# Altium PCB Motherboard_Rev1_A.PcbDoc
Units mil, origin at the board's own origin, x right, y up, seen from the top; angles counter-clockwise.
Board outline 3937 x 3937 mil, 4 copper layers (POWER, GND, HIGH-SPEED, LOW-SPEED), stack 66.024 mil thick; 25 components, 2 nets, 102 pads, 244 vias.
Unrouted connection lines stored in the file: 15.
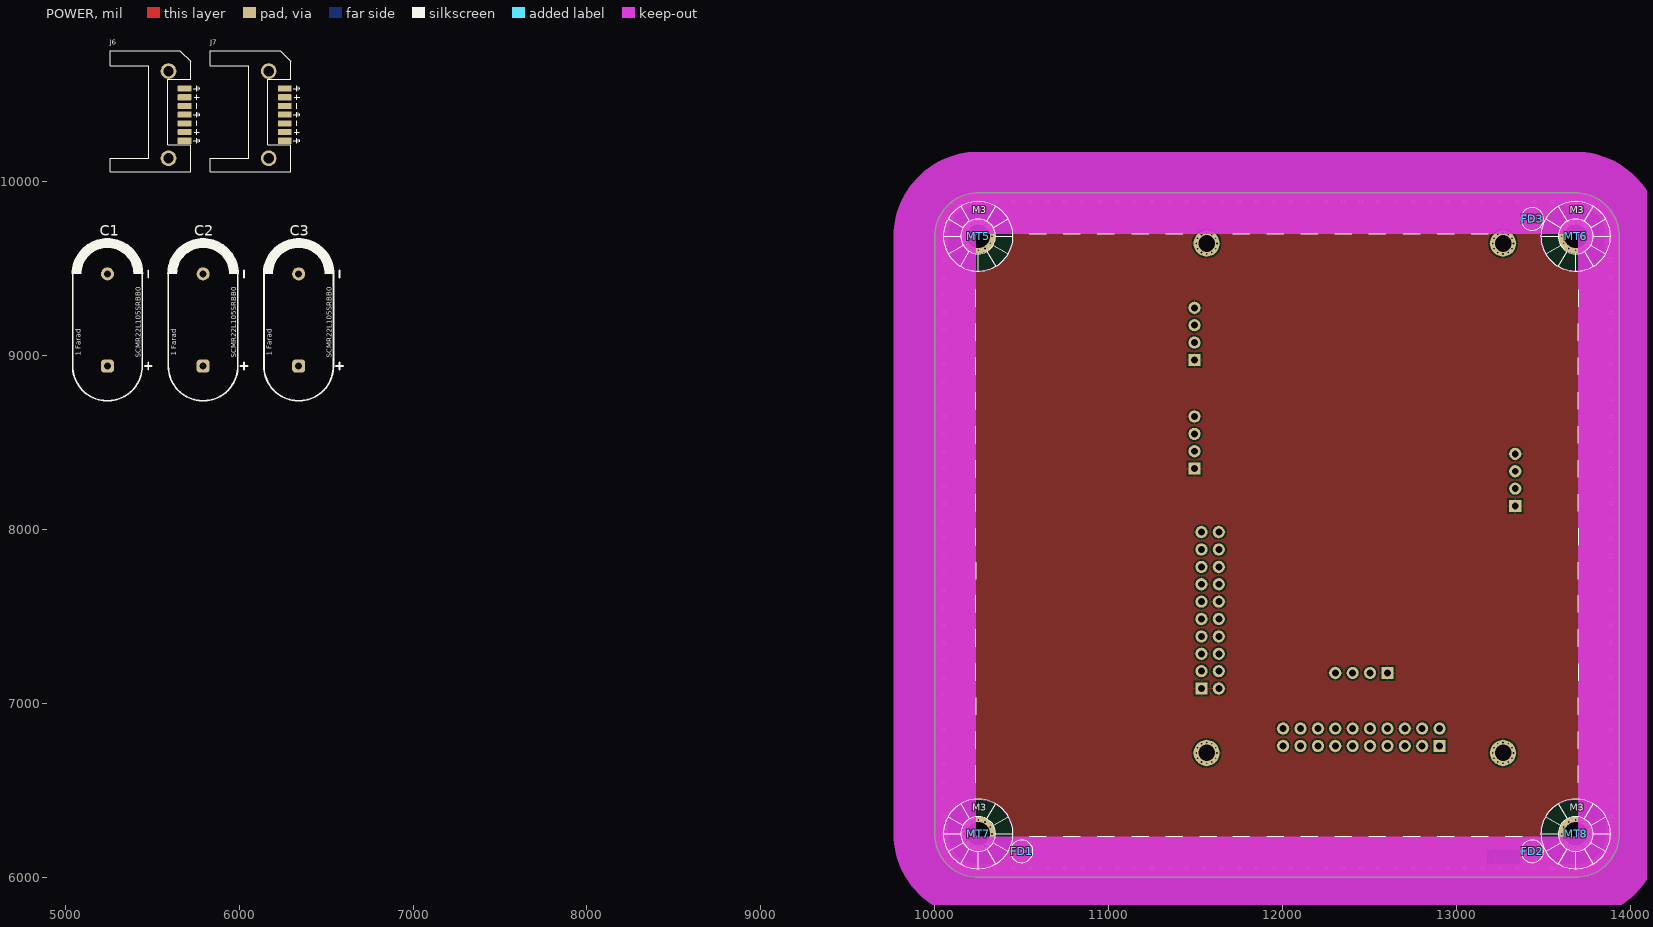
[diagram p0: POWER view]
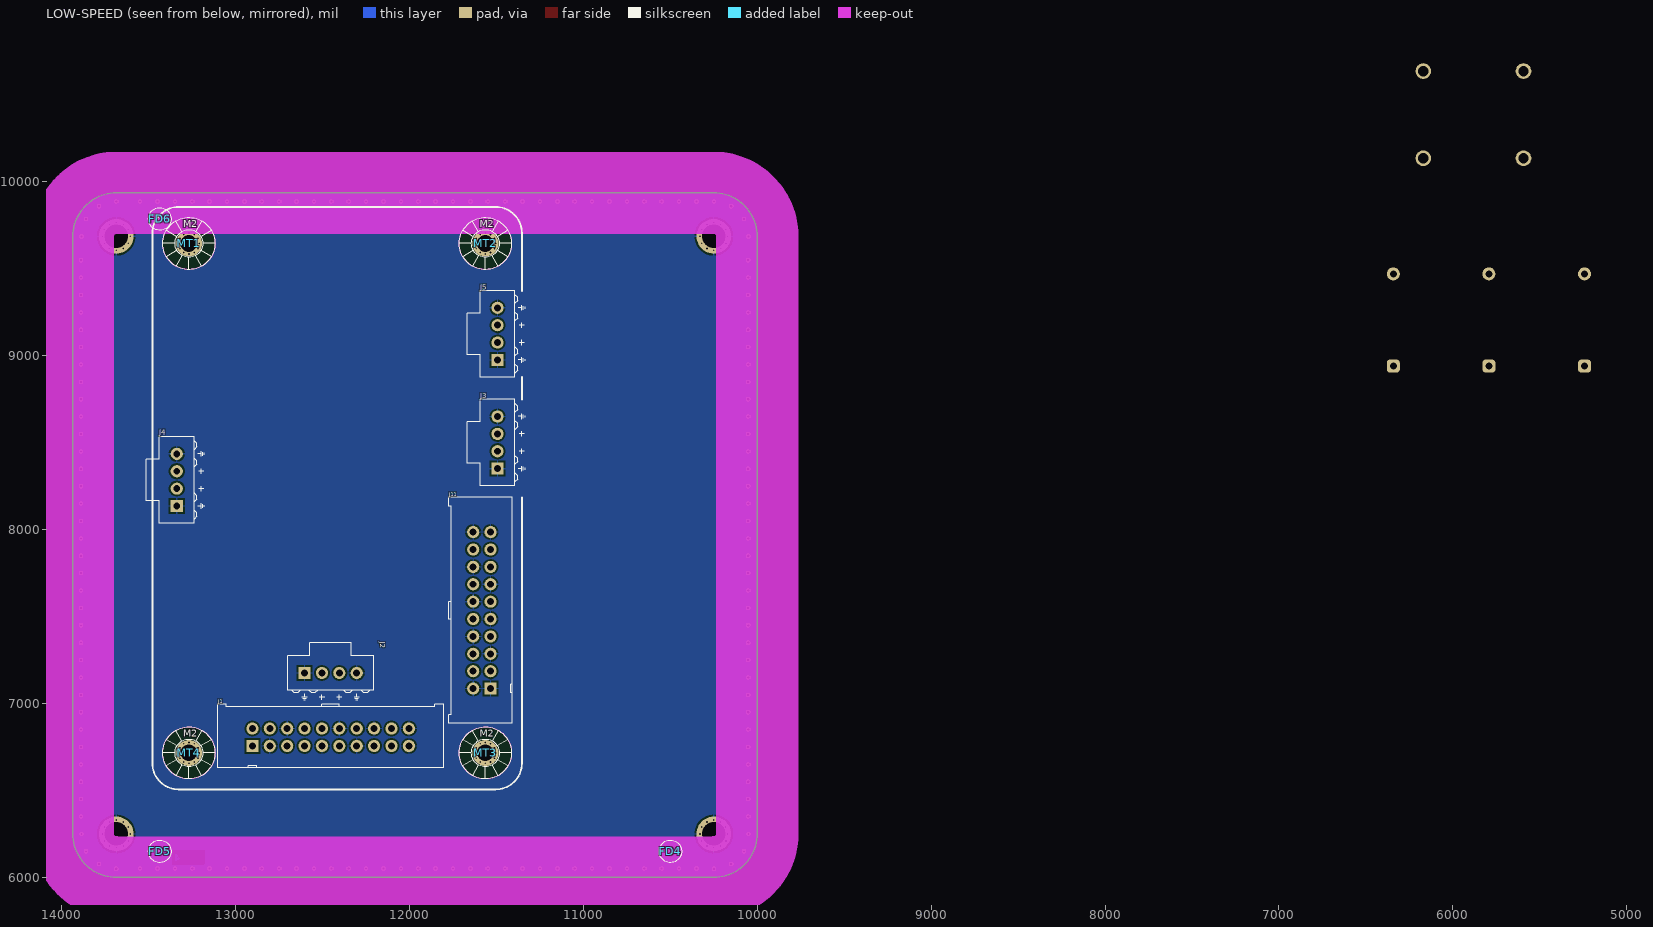
[diagram p1: LOW-SPEED view, seen from below]
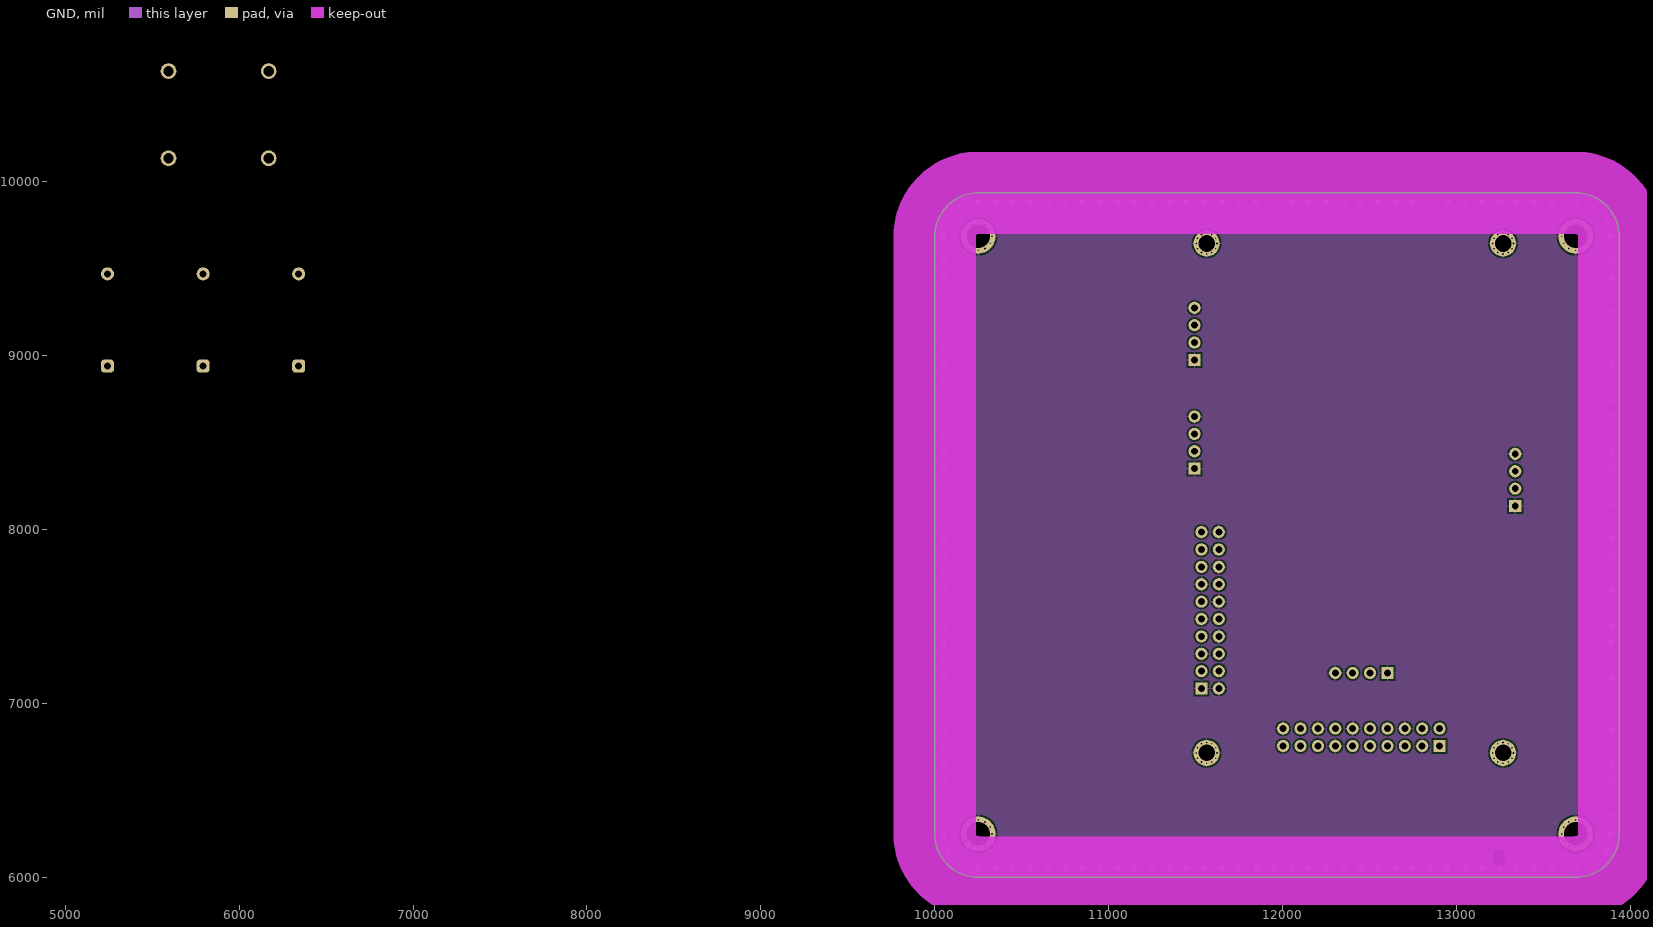
[diagram p2: GND]
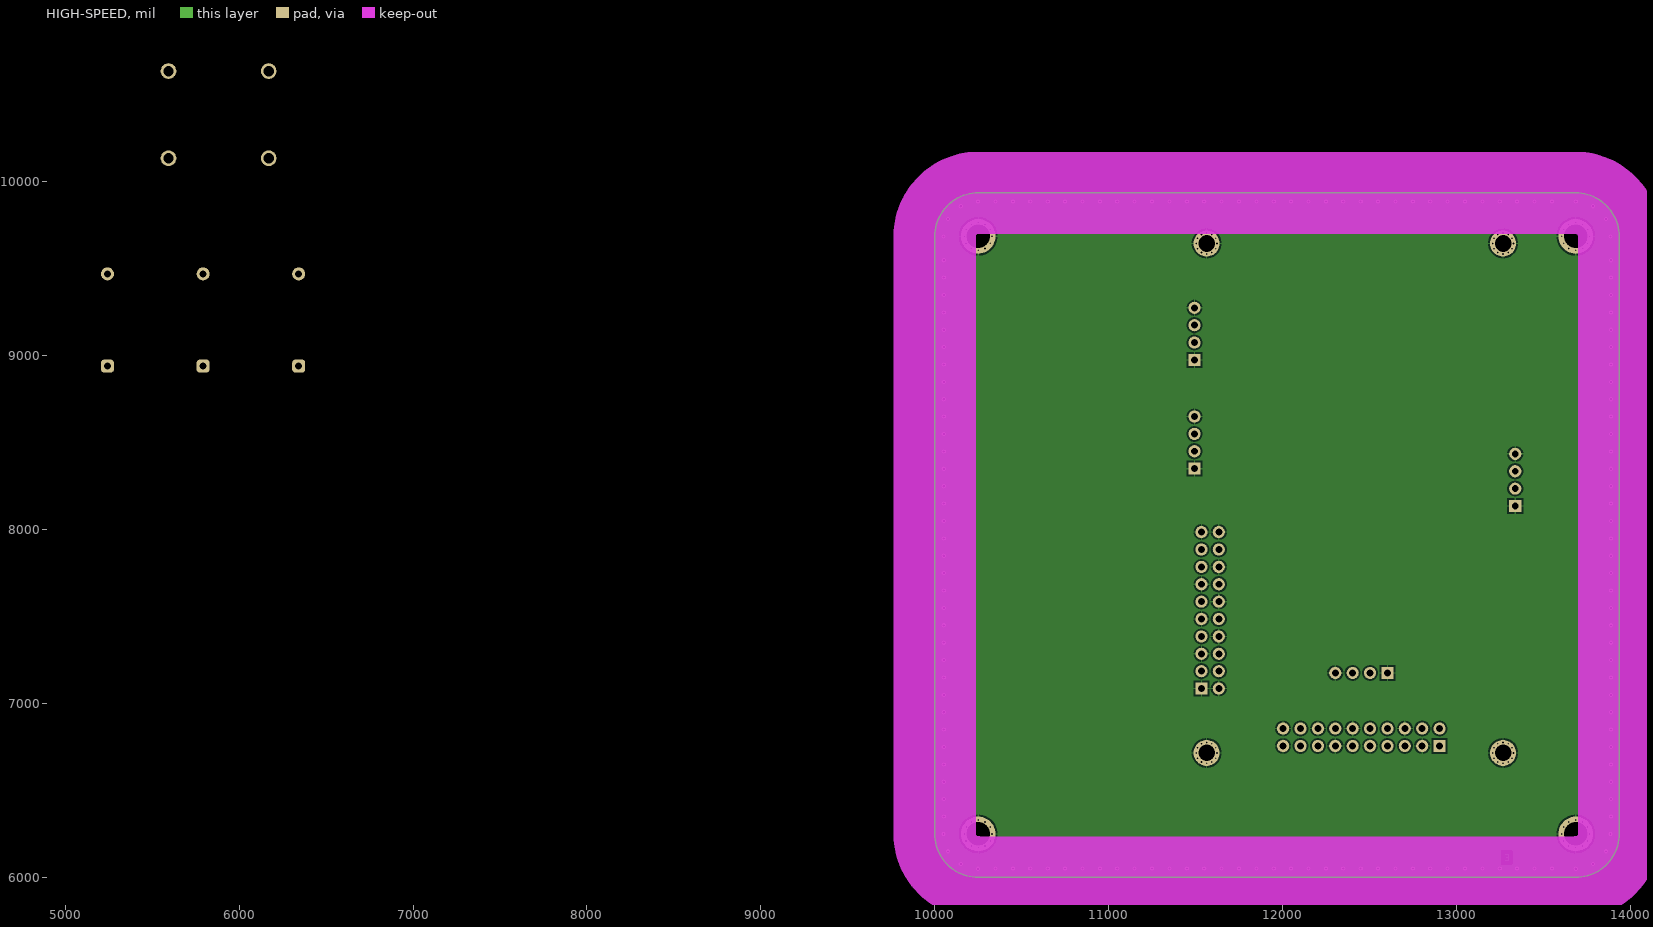
[diagram p3: HIGH-SPEED]

## Layer stack, top to bottom
Top Solder: solder mask 0.4, Solder Resist, Dk 3.5
POWER: signal copper 2.756
Dielectric 1: prepreg 8, PP-006, Dk 4.1
GND: signal copper 2.756
Dielectric1: dielectric 39, FR-4, Dk 4.8
HIGH-SPEED: signal copper 2.756
Dielectric 2: prepreg 8, PP-006, Dk 4.1
LOW-SPEED: signal copper 2.756
Bottom Solder: solder mask 0.4, Solder Resist, Dk 3.5

## Board outline
10000,6250 ccw(c10250,6250) 10250,6000 13687,6000 ccw(c13687,6250) 13937,6250 13937,9687 ccw(c13687,9687) 13687,9937 10250,9937 ccw(c10250,9687) 10000,9687

## Design rules (kind name [scope] priority, off if disabled: settings)
Clearance CLEARANCE_GROUND_RING [IsCopperRegion and (InNet('GND') or InNet('PGND') or InNet('QGND')) vs HasFootprint('MTH_M?')] p1: gap=0 ignorepadtopadclearanceinfootprint=FALSE
Clearance CLEARANCE_KEEPOUT [(IsPad and HasFootprint('FIDUCIAL')) or (IsText) or (InNet('GND') or InNet('PGND') or InNet('QGND')) or IsCopperRegion vs OnLayer('Keep-Out Layer')] p2: gap=0 ignorepadtopadclearanceinfootprint=TRUE
Clearance [All] p3: gap=10 ignorepadtopadclearanceinfootprint=FALSE except(0: Arc-Hole Track-Hole SMDPad-Hole THPad-Hole Via-Hole Fill-Hole Poly-Hole Region-Hole Text-Hole)
ComponentClearance ComponentClearance_FIDUCIAL [HasFootprint('FIDUCIAL')] p1: gap=0 collisioncheckmode=3 verticalgap=0 showdistances=FALSE
ComponentClearance [All] p2: gap=10 collisioncheckmode=3 verticalgap=10 showdistances=FALSE
FabricationTestPointUsage TestPointUsage [All] p1: valid=0 allowmultiple=FALSE
FabricationTestpoint Testpoint [All] p1: side=3 testpointundercomponent=TRUE minsize=40 maxsize=100 preferedsize=60 minholesize=0 maxholesize=40 preferedholesize=32 testpointgrid=1 allowsidetop=TRUE allowsidebottom=TRUE usegrid=TRUE gridtolerance=0.01
PlaneConnect [All] p1: planeconnectstyle=Direct reliefexpansion=20 reliefentries=4 reliefconductorwidth=10 reliefairgap=10
PolygonConnect [All] p1: connectstyle=Relief reliefconductorwidth=10 reliefentries=4 polygonreliefangle="90 Angle" airgapwidth=10
RoutingLayers [All] p1: top layer_v5=TRUE mid layer 1_v5=FALSE mid layer 2_v5=FALSE bottom layer_v5=TRUE
RoutingVias [All] p1: holewidth=28 width=50 viastyle="Through Hole" minholewidth=28 minwidth=50 maxholewidth=28 maxwidth=50
SilkToSolderMaskClearance SilkscreenOverComponentPads [IsPad] p1: minsilkscreentomaskgap=10 clearancetoexposedcopper=TRUE
SolderMaskExpansion [All] p1: expansion=4 istentingtop=FALSE
Width [All] p1: maxlimit=10 minlimit=10 preferedwidth=10
24 further rules are at their usual default settings.

## Classes and differential pairs
component class Power: C1 C2 C3
component class "Mechanical and Interconnect": FD1 FD2 FD3 FD4 FD5 FD6 J1 J2 J3 J4 J5 J6 J7 J11 MT1 MT2 MT3 MT4 MT5 MT6 MT7 MT8

## Components (designator, comment, footprint, x,y, rotation, side; value= is the part's Value field where it differs from the comment)
C1 "1F" SCMR22L105SRBB0 5242,9206 r90 top
C2 "1F" SCMR22L105SRBB0 5792,9206 r90 top
C3 "1F" SCMR22L105SRBB0 6342,9206 r90 top
FD1 "FIDUCIAL" FIDUCIAL 10500,6150 r0 top
FD2 "FIDUCIAL" FIDUCIAL 13437,6150 r0 top
FD3 "FIDUCIAL" FIDUCIAL 13437,9787 r0 top
FD4 "FIDUCIAL" FIDUCIAL 10500,6150 r180 bottom
FD5 "FIDUCIAL" FIDUCIAL 13437,6150 r180 bottom
FD6 "FIDUCIAL" FIDUCIAL 13437,9787 r180 bottom
J1 "TST-110-01-F-D" TST-110-01-F-D 12454,6813.48 r180 bottom
J2 "5-103639-3" 5-103639-3 12454,7176 r180 bottom
J3 "5-103639-3" 5-103639-3 11494,8501 r90 bottom
J4 "5-103639-3" 5-103639-3 13339,8286 r90 bottom
J5 "5-103639-3" 5-103639-3 11494,9126 r90 bottom
J6 "5607-4200-SH" 5607-4200-SH 5440,10387 r90 top
J7 "5607-4200-SH" 5607-4200-SH 6016,10387 r90 top
J11 "TST-110-01-F-D" TST-110-01-F-D 11591.48,7536 r90 bottom
MT1 "M2" MTH_M2 13269,9646 r180 bottom
MT2 "M2" MTH_M2 11564,9646 r180 bottom
MT3 "M2" MTH_M2 11564,6716 r180 bottom
MT4 "M2" MTH_M2 13269,6716 r180 bottom
MT5 "M3" MTH_M3 10250,9687 r0 top
MT6 "M3" MTH_M3 13687,9687 r0 top
MT7 "M3" MTH_M3 10250,6250 r0 top
MT8 "M3" MTH_M3 13687,6250 r0 top

## Footprints (in the part's own frame and the unit in brackets; to place one, negate y for a bottom-side part, rotate by r counter-clockwise, add the part's x,y. Pads: shape width x height; smd on the part's side, far side on the other; paste and mask are expansions set on the pad)
5-103639-3 [mil]
  rect 70x70 hole 40: 1(-150,0)
  round 70 hole 40: 2(-50,0) 3(50,0) 4(150,0)
  round 15 on Bottom Overlay: ""(-150,174)
  silkscreen extent -248,-158 248,175, body extent -247,-115 247,160, height 536
5607-4200-SH [mil]
  rect 35x80 smd: 1(-150,-246)
  rrect25% 35x80 smd: 2(-100,-246) 3(-50,-246) 4(0,-246) 5(50,-246) 6(100,-246) 7(150,-246)
  round 90 hole 60: 8(-250.79,-153.15) 9(250.79,-153.15)
  round 20 on Top Overlay: ""(-184,-304)
  silkscreen extent -329,-333 368,183, body extent -328,-278 360,175, height 158
FIDUCIAL [mil]
  round 40 smd paste-999 mask+40: 1(0,0)
  silkscreen extent -65,-65 65,65
MTH_M2 [mil]
  round 150 hole 95: 1(0,0)
  POWER keep-out region: 0,-150 -57.4,-138.58 -106.07,-106.07 -138.58,-57.4 -150,0 -150,0 -138.58,57.4 -106.07,106.07 -57.4,138.58 0,150 0,150 57.4,138.58 106.07,106.07 138.58,57.4 150,0 150,0 138.58,-57.4 106.07,-106.07 57.4,-138.58 0,-150
  silkscreen extent -150,-150 150,150
MTH_M3 [mil]
  round 200 hole 135: 1(0,0)
  POWER keep-out region: 0,-200 -76.54,-184.78 -141.42,-141.42 -184.78,-76.54 -200,0 -200,0 -184.78,76.54 -141.42,141.42 -76.54,184.78 0,200 0,200 76.54,184.78 141.42,141.42 184.78,76.54 200,0 200,0 184.78,-76.54 141.42,-141.42 76.54,-184.78 0,-200
  silkscreen extent -200,-200 200,200
SCMR22L105SRBB0 [mil]
  rrect50% 75x75 hole 40: 1(-265,0)
  round 75 hole 40: 2(265,0)
  silkscreen extent -465,-255 470,205, body extent -423,-157 423,158, height 872
TST-110-01-F-D [mil]
  rect 70x70 hole 40: 1(-450,-57.48)
  round 70 hole 40: 2(-450,42.52) 3(-350,-57.48) 4(-350,42.52) 5(-250,-57.48) 6(-250,42.52) 7(-150,-57.48) 8(-150,42.52) 9(-50,-57.48) 10(-50,42.52) 11(50,-57.48) 12(50,42.52) 13(150,-57.48) 14(150,42.52) 15(250,-57.48) 16(250,42.52) 17(350,-57.48) 18(350,42.52) 19(450,-57.48) 20(450,42.52)
  round 15 on Bottom Overlay: ""(-450,-200)
  silkscreen extent -650,-183 650,183, body extent -650,-182 650,183, height 351

## Part data
C1 C2 C3: library part CAP_SCMR22L105SRBB0, "CAP 1F -10% +30% 9V T/H", Digikey Part Number=478-11316-ND, Manufacturer Part Number=SCMR22L105SRBB0, Mfr="AVX Corporation", Operating Temperature="-40C - 65C", Rated Voltage=9V, Tolerance="-10% +30%", ComponentLink1Description=Digikey, ComponentLink1URL=https://www.digikey.ca/en/products/detail/avx-corporation/SCMR22L105SRBB0/7595432, ComponentLink2Description=Mouser, ComponentLink2URL=https://www.mouser.ca/ProductDetail/AVX/SCMR22L105SRBB0
J1 J11: library part CONN_TST-100-01-F-D, "CONN HEADER VERT 20POS 2.54MM", Current Rating="3.4A per contact", Mfr="Samtech Inc.", Operating Temperature="-55C - 125C", Supplier Part Number 1=SAM10320-ND, Contact Length=250mils, Mounting Type="Through Hole", Number of positions=20, Number of rows=2, Pitch=100mils, Supplier 1=Digi-Key
J2 J3 J4 J5: library part CONN_5-103639-3, "CONN HEADER VERT 4POS 2.54MM", Current="5.2A / contact", Mfr="TE Connectivity", Operating Temperature="-65C - 105C", Contact Length=230mil, Number of positions=4, Pitch=100mil
J6 J7: library part CONN_5607-4200-SH, "7 Position SATA Plug Connector Solder Surface Mount, Right Angle", Mfr=3M, Supplier Part Number 1=3M5561-ND, Supplier 1=Digi-Key
MT1 MT2 MT3 MT4 MT5 MT6 MT7 MT8: library part MOUNTING_HOLE

## Via types
v1: diameter 24, hole 12, POWER to LOW-SPEED, tented both sides, 148 vias
v2: diameter 20, hole 10, POWER to LOW-SPEED, 96 vias

## Nets (pads, with @x,y where several pads share a name; then routed paths per layer and width w, separated by ;. In a path a pad name is that pad's centre, name@x,y a point inside that pad or via, vN(x,y) a via of type N, cw(c..) or ccw(c..) an arc to the next point about the centre after c; other vN are vias at no path point)
+6V: C1.1 C2.1 C3.1
GND: C1.2 C2.2 C3.2 J1.3 J1.6 J1.9 J1.12 J1.13 J1.16 J1.19 J1.20 J2.1 J2.4 J3.1 J3.4 J4.1 J4.4 J5.1 J5.4 J6.1 J6.4 J6.7 J6.8 J6.9 J7.1 J7.4 J7.7 J7.8 J7.9 J11.1 J11.2 J11.5 J11.8 J11.9 J11.12 J11.13 J11.16 J11.19 J11.20 MT1.1 MT2.1 MT3.1 MT4.1 MT5.1 MT6.1 MT7.1 MT8.1
  other v1: 10250,6050 13687,6050 10350,6052 10450,6052 10550,6052 10650,6052 10750,6052 10850,6052 10950,6052 11050,6052 11150,6052 11250,6052 11350,6052 11450,6052 11550,6052 11650,6052 11750,6052 11850,6052 11950,6052 12050,6052 12150,6052 12250,6052 12350,6052 12450,6052 12550,6052 12650,6052 12750,6052 12850,6052 12950,6052 13050,6052 13150,6052 13250,6052 13350,6052 13450,6052 13550,6052 10150,6076.79 13787,6076.79 10076.79,6150 13860.21,6150 10050,6250 13887,6250 10052,6350 13889,6350 10052,6450 13889,6450 10052,6550 13889,6550 10052,6650 13889,6650 10052,6750 13889,6750 10052,6850 13889,6850 10052,6950 13889,6950 10052,7050 13889,7050 10052,7150 13889,7150 10052,7250 13889,7250 10052,7350 13889,7350 10052,7450 13889,7450 10052,7550 13889,7550 10052,7650 13889,7650 10052,7750 13889,7750 10052,7850 13889,7850 10052,7950 13889,7950 10052,8050 13889,8050 10052,8150 13889,8150 10052,8250 13889,8250 10052,8350 13889,8350 10052,8450 13889,8450 10052,8550 13889,8550 10052,8650 13889,8650 10052,8750 13889,8750 10052,8850 13889,8850 10052,8950 13889,8950 10052,9050 13889,9050 10052,9150 13889,9150 10052,9250 13889,9250 10052,9350 13889,9350 10052,9450 13889,9450 10052,9550 13889,9550 10050,9687 13887,9687 10076.79,9787 13860.21,9787 10150,9860.21 13787,9860.21 10250,9887 10350,9887 10450,9887 10550,9887 10650,9887 10750,9887 10850,9887 10950,9887 11050,9887 11150,9887 11250,9887 11350,9887 11450,9887 11550,9887 11650,9887 11750,9887 11850,9887 11950,9887 12050,9887 12150,9887 12250,9887 12350,9887 12450,9887 12550,9887 12650,9887 12750,9887 12850,9887 12950,9887 13050,9887 13150,9887 13250,9887 13350,9887 13450,9887 13550,9887 13687,9887
  other v2: 10250,6170 13687,6170 10210,6180.72 10290,6180.72 13647,6180.72 13727,6180.72 10180.72,6210 10319.28,6210 13617.72,6210 13756.28,6210 10170,6250 10330,6250 13607,6250 13767,6250 10180.97,6290.11 10319.28,6290 13617.97,6290.11 13756.28,6290 10210,6319.28 10290,6319.28 13647,6319.28 13727,6319.28 10250,6330 13687,6330 11564,6656 13269,6656 11534,6664.04 11594,6664.04 13239,6664.04 13299,6664.04 11512.04,6686 11615.96,6686 13217.04,6686 13320.96,6686 11504,6716 11624,6716 13209,6716 13329,6716 11512.04,6746 11615.96,6746 13217.04,6746 13320.96,6746 11534,6767.96 11594,6767.96 13239,6767.96 13299,6767.96 11564,6776 13269,6776 11564,9586 13269,9586 11534,9594.04 11594,9594.04 13239,9594.04 13299,9594.04 10250,9607 13687,9607 11512.04,9616 11615.96,9616 13217.04,9616 13320.96,9616 10210,9617.72 10290,9617.72 13647,9617.72 13727,9617.72 11504,9646 11624,9646 13209,9646 13329,9646 10180.72,9647 10319.28,9647 13617.72,9647 13756.28,9647 11512.04,9676 11615.96,9676 13217.04,9676 13320.96,9676 10170,9687 10330,9687 13607,9687 13767,9687 11534,9697.96 11594,9697.96 13239,9697.96 13299,9697.96 11564,9706 13269,9706 10180.97,9727.11 10319.28,9727 13617.97,9727.11 13756.28,9727 10210,9756.28 10290,9756.28 13647,9756.28 13727,9756.28 10250,9767 13687,9767
pads on no net: FD1.1 FD2.1 FD3.1 FD4.1 FD5.1 FD6.1 J1. J1.1 J1.2 J1.4 J1.5 J1.7 J1.8 J1.10 J1.11 J1.14 J1.15 J1.17 J1.18 J2. J2.2 J2.3 J3. J3.2 J3.3 J4. J4.2 J4.3 J5. J5.2 J5.3 J6. J6.2 J6.3 J6.5 J6.6 J7. J7.2 J7.3 J7.5 J7.6 J11. J11.3 J11.4 J11.6 J11.7 J11.10 J11.11 J11.14 J11.15 J11.17 J11.18

## Polygon pours and split planes (outlines as drawn)
GND on POWER "GND_L01_P003" (solid, pour order 3): 10000.71,6249.79 ccw(c10250.71,6249.79) 10250.71,5999.79 13687.71,5999.79 ccw(c13687.71,6249.79) 13937.71,6249.79 13937.71,9686.79 ccw(c13687.71,9686.79) 13687.71,9936.79 10250.71,9936.79 ccw(c10250.71,9686.79) 10000.71,9686.79
GND on GND "GND_L02_P000" (solid, pour order 0): 10000.71,6249.79 ccw(c10250.71,6249.79) 10250.71,5999.79 13687.71,5999.79 ccw(c13687.71,6249.79) 13937.71,6249.79 13937.71,9686.79 ccw(c13687.71,9686.79) 13687.71,9936.79 10250.71,9936.79 ccw(c10250.71,9686.79) 10000.71,9686.79
GND on HIGH-SPEED "GND_L03_P001" (solid, pour order 1): 10000.71,6249.79 ccw(c10250.71,6249.79) 10250.71,5999.79 13687.71,5999.79 ccw(c13687.71,6249.79) 13937.71,6249.79 13937.71,9686.79 ccw(c13687.71,9686.79) 13687.71,9936.79 10250.71,9936.79 ccw(c10250.71,9686.79) 10000.71,9686.79
GND on LOW-SPEED "GND_L04_P002" (solid, pour order 2): 10000.71,6249.79 ccw(c10250.71,6249.79) 10250.71,5999.79 13687.71,5999.79 ccw(c13687.71,6249.79) 13937.71,6249.79 13937.71,9686.79 ccw(c13687.71,9686.79) 13687.71,9936.79 10250.71,9936.79 ccw(c10250.71,9686.79) 10000.71,9686.79

## Keep-outs
Keep-Out Layer:
  the board outline again, w472.44

## Other copper
POWER:
  region net GND: 10250,9907 ccw(c10249.97,9687.03) 10030,9687 10030,6250 ccw(c10249.99,6249.99) 10250,6030 13687,6030 ccw(c13687.02,6249.98) 13907,6250 13907,9687 ccw(c13687.03,9687.03) 13687,9907 10320,9907 10320,9862 13687,9862 cw(c13686.53,9687.53) 13861,9687 13862,6250 cw(c13687.04,6249.96) 13687,6075 10250,6076 cw(c10249.49,6250.49) 10075,6250 10075,9687 cw(c10250,9687) 10250,9862 10320,9862 10320,9907
  pour cut-out: 13180,6076 13180,6156 13365,6156 13365,6076
  text "1" at 13203,6094 h40
GND:
  text "2" at 13231,6094 h40
HIGH-SPEED:
  text "3" at 13276,6094 h40
LOW-SPEED:
  pour cut-out: 13180,6076 13180,6156 13365,6156 13365,6076
  text "4" at 13318,6094 h40

## Silkscreen, mask and mechanical layers (free items; w line width, h text height)
Top Overlay:
  lines w7: 10236,6544 10236,6642 ; 10236,6740 10236,6838 ; 10236,6936 10236,7034 ; 10236,7132 10236,7230 ; 10236,7328 10236,7426 ; 10236,7524 10236,7622 ; 10236,7713.71 10236,7811.71 ; 10236,7909.71 10236,8007.71 ; 10236,8105.71 10236,8203.71 ; 10236,8301.71 10236,8399.71 ; 10236,8497.71 10236,8595.71 ; 10236,8693.71 10236,8791.71 ; 10236,8889.71 10236,8987.71 ; 10236,9085.71 10236,9183.71 ; 10236,9281.71 10236,9379.71 ; 10544,6236 10642,6236 ; 10544,9701 10642,9701 ; 10740,6236 10838,6236 ; 10740,9701 10838,9701 ; 10936,6236 11034,6236 ; 10936,9701 11034,9701 ; 11132,6236 11230,6236 ; 11132,9701 11230,9701 ; 11328,6236 11426,6236 ; 11328,9701 11426,9701 ; 11524,6236 11622,6236 ; 11713.71,6236 11811.71,6236 ; 11713.71,9701 11811.71,9701 ; 11909.71,6236 12007.71,6236 ; 11909.71,9701 12007.71,9701 ; 12105.71,6236 12203.71,6236 ; 12105.71,9701 12203.71,9701 ; 12301.71,6236 12399.71,6236 ; 12301.71,9701 12399.71,9701 ; 12497.71,6236 12595.71,6236 ; 12497.71,9701 12595.71,9701 ; 12693.71,6236 12791.71,6236 ; 12693.71,9701 12791.71,9701 ; 12889.71,6236 12987.71,6236 ; 12889.71,9701 12987.71,9701 ; 13085.71,6236 13183.71,6236 ; 13085.71,9701 13183.71,9701 ; 13281.71,6236 13379.71,6236 ; 13701,6544 13701,6642 ; 13701,6740 13701,6838 ; 13701,6936 13701,7034 ; 13701,7132 13701,7230 ; 13701,7328 13701,7426 ; 13701,7524 13701,7622 ; 13701,7713.71 13701,7811.71 ; 13701,7909.71 13701,8007.71 ; 13701,8105.71 13701,8203.71 ; 13701,8301.71 13701,8399.71 ; 13701,8497.71 13701,8595.71 ; 13701,8693.71 13701,8791.71 ; 13701,8889.71 13701,8987.71 ; 13701,9085.71 13701,9183.71 ; 13701,9281.71 13701,9379.71
Bottom Overlay:
  lines w10: 11354,8186 11354,6656 ccw(c11504,6656) 11504,6506 13329,6506 ccw(c13329,6656) 13479,6656 13479,9706.17 ; 11354,8747.37 11354,8878.37 ; 11354,9372.37 11354,9706 cw(c11504,9706) 11504,9856 13329,9856 ; 13479,9706 ccw(c13329,9706) 13329,9856 ; 13329,9856 13329,9856
M1_Outline:
  lines w10: 10000,6250 ccw(c10250,6250) 10250,6000 ; 10000,6250 ccw(c10250,6250) 10250,6000 ; 10000,6250 10000,9687 ; 10000,6250 10000,9687 ; 10000,9687 cw(c10250,9687) 10250,9937 ; 10000,9687 cw(c10250,9687) 10250,9937 ; 10250,6000 13687,6000 ; 10250,6000 13687,6000 ; 10250,9937 13687,9937 ; 10250,9937 13687,9937 ; 13687,6000 ccw(c13687,6250) 13937,6250 ; 13687,6000 ccw(c13687,6250) 13937,6250 ; 13687,9937 cw(c13687,9687) 13937,9687 ; 13687,9937 cw(c13687,9687) 13937,9687 ; 13937,6250 13937,9687 ; 13937,6250 13937,9687
M15_Manufacturing_Notes:
  drawing of 231 lines, arcs and shapes, not listed
  text "Layer" at 14032.89,15192.5 h125
  text "Name" at 14885.21,15192.5 h125
  text "Material" at 16820.51,15192.5 h125
  text "Thickness" at 18610.02,15192.5 h125
  text "Constant" at 19962.18,15192.5 h125
  text "Gerber" at 21147.72,15192.5 h125
  text "FILE LIST:" at 9770,15185 h100
  text "Top Overlay" at 14885.21,14942.5 h125
  text "GTO" at 21147.72,14942.5 h125
  text "Top Solder" at 14885.21,14692.5 h125
  text "Solder Resist" at 16820.51,14692.5 h125
  text "0,40mil" at 18610.02,14692.5 h125
  text "3.5" at 19962.18,14692.5 h125
  text "GTS" at 21147.72,14692.5 h125
  text "1" at 14032.89,14442.5 h125
  text "POWER" at 14885.21,14442.5 h125
  text "2,76mil" at 18610.02,14442.5 h125
  text "GTL" at 21147.72,14442.5 h125
  text "Dielectric 1" at 14885.21,14192.5 h125
  text "PP-006" at 16820.51,14192.5 h125
  text "8,00mil" at 18610.02,14192.5 h125
  text "4.1" at 19962.18,14192.5 h125
  text "2" at 14032.89,13942.5 h125
  text "GND" at 14885.21,13942.5 h125
  text "2,76mil" at 18610.02,13942.5 h125
  text "G1" at 21147.72,13942.5 h125
  text "Dielectric1" at 14885.21,13692.5 h125
  text "FR-4" at 16820.51,13692.5 h125
  text "39,00mil" at 18610.02,13692.5 h125
  text "4.8" at 19962.18,13692.5 h125
  text "3" at 14032.89,13442.5 h125
  text "HIGH-SPEED" at 14885.21,13442.5 h125
  text "2,76mil" at 18610.02,13442.5 h125
  text "G2" at 21147.72,13442.5 h125
  text "Dielectric 2" at 14885.21,13192.5 h125
  text "PP-006" at 16820.51,13192.5 h125
  text "8,00mil" at 18610.02,13192.5 h125
  text "4.1" at 19962.18,13192.5 h125
  text "4" at 14032.89,12942.5 h125
  text "LOW-SPEED" at 14885.21,12942.5 h125
  text "2,76mil" at 18610.02,12942.5 h125
  text "GBL" at 21147.72,12942.5 h125
  text "Bottom Solder" at 14885.21,12692.5 h125
  text "Solder Resist" at 16820.51,12692.5 h125
  text "0,40mil" at 18610.02,12692.5 h125
  text "3.5" at 19962.18,12692.5 h125
  text "GBS" at 21147.72,12692.5 h125
  text "Bottom Overlay" at 14885.21,12442.5 h125
  text "GBO" at 21147.72,12442.5 h125
  text "Total board thickness:" at 14032.89,12192.5 h125
  text "66,82mil" at 18610.02,12192.5 h125
  text ".gtp - Top Solder Paste / .gts - Top Soldermask /  / .gtl - Top Copper    (Layer 1) / .g1  - Inner Copper  (Layer 2) / .g2  - Inner Copper  (Layer 3) / .gbl - Bottom Copper (Layer 4) /  / .gbs - Bottom Soldermask / .gbo - Bottom Silkscreen / .gbp - Bottom Solder Paste /  / .gm1 - Board Outline / .gm2 - Top Assembly / .gm3 - Bottom Assembly / .gm13 - Dimensions / .gm14 - Assembly Notes / .gm15 - Manufacturing Notes / .gm16 - Title Block /  / .gd1 - Drill Drawing / .gg1 - Drill Guide" at 9755,12030 h75
  text "FABRICATION NOTES: / [1]     FABRICATE TO IPC CLASS 2 STANDARD. / [2]     ADD MANUFACTURING MARKING (LOGO / DATE / UL MARKING / RoHS) ON SILKSCREEN BOTTOM SIDE OF PCB. /            ([.gbo], IN AREA MARKED #2 IN MANUFACTURING NOTES LAYER [M15]) / [3]     FABRICATE PCB USING ONLY RoHS COMPLIANT MATERIALS. /            FINAL PRODUCT SHALL BE ACCEPTABLE TO USE IN RoHS ASSEMBLY. / [4]     MATERIAL SHALL MEET UL 94V-0 FAMMABILITY RATING. / [5]     DO NOT APPLY SILKSCREEN OVER EXPOSED COPPER. /            CLIP SILKSCREEN AROUND EXPOSED COPPER. / [6]     DO NOT FILL VIAS OR PLATE OVER. /            TREAT VIA-IN-PAD AS NORMAL PTH VIAS. / [7]     TENT VIAS WITH SOLDERMASK ACCORDING TO SOLDERMASK LAYERS. / [8]     DIAMETERS IN HOLE TABLE ARE FINISHED SIZES. / [9]     APPLY GREEN HIGHLY TRANSPARENT SOLDERMASK OVER BARE COPPER ACCORDING TO SOLDERMASKS LAYERS. / [10]    APPLY NON-CONDUCTIVE WHITE INK AFTER SOLDERMASK ACCORDING TO SILKSCREEN LAYERS. / [11]    APPLY ENIG OR ENEPIG SURFACE FINISH ON ALL EXPOSED COPPER / [12]    BOW AND TWIST SHALL NOT EXCEED 0.01 INCH PER INCH. / [13]    ALL SPECIFICATIONS REFERENCED SHALL BE OF THE LATEST REVISION. /            ALL DESIGN MODIFICATIONS MUST BE APPROVED BY CUSTOMER. / [14]    BOARD IS VIEWED FROM PRIMARY SIDE (LAYER 1 - TOP). /            THE STACKUP (SEE STACKUP DETAILS ON MANUFACTURING NOTES [M15]) HAS 4 CONDUCTIVE LAYERS. /            ALL CONDUCTIVE LAYERS ARE 2OZ/INCH THICK +/- 10% / [16]    MINIMUM TRACE WIDTH AND CLEARANCE ARE 8MILS / 8MILS / [17]    MINIMUM HOLE SIZE AFTER PLATING IS 10MILS. REFER TO DRILL TABLE FOR TOLERANCES. / [18]    APPLY SOLDER RESIST BETWEEN ALL SMT PADS." at 376,378 h100
M16_Title Block:
  lines w20: 0,3925 300,3925 ; 0,7850 300,7850 ; 0,11775 300,11775 ; 2790,0 2790,300 ; 2790,15400 2790,15700 ; 5570,0 5570,300 ; 5570,15400 5570,15700 ; 8360,0 8360,300 ; 8360,15400 8360,15700 ; 11150,0 11150,300 ; 11150,15400 11150,15700 ; 13935,0 13935,300 ; 13935,15400 13935,15700 ; 16725,0 16725,300 ; 16725,15400 16725,15700 ; 17500,600 22000,600 ; 17500,900 22000,900 ; 17500,1200 19000,1200 ; 19000,300 19000,900 19000,1500 ; 19510,0 19510,300 ; 19510,15400 19510,15700 ; 21100,300 21100,900 ; 22000,3925 22300,3925 ; 22000,7850 22300,7850 ; 22000,11775 22300,11775 ; 17500,300 17500,1500 ; 17500,300 22000,300 ; 17500,300 16100,300 16100,1500 17500,1500 ; 17500,1500 19000,1500 ; 19000,1500 22000,1500 22000,300 ; 22000,300 300,300 300,15400 22000,15400 22000,300 ; 0,0 0,15700 22300,15700 22300,0 0,0
  text "1" at 1376.34,15515 h100
  text "2" at 4157,15515 h100
  text "3" at 6936.34,15515 h100
  text "4" at 9733.01,15515 h100
  text "5" at 12516.35,15515 h100
  text "6" at 15307,15515 h100
  text "7" at 18107,15515 h100
  text "8" at 20887,15515 h100
  text "A" at 125,13657 h100
  text "A" at 22125,13657 h100
  text "B" at 125,9727 h100
  text "B" at 22125,9727 h100
  text "C" at 125,5807 h100
  text "C" at 22125,5807 h100
  text "D" at 125,1877 h100
  text "D" at 22125,1877 h100
  text "TITLE:" at 19050,1400 h45
  text "PASCAL-EMMANUEL LACHANCE" at 17545,1325 h60
  text "BENJAMIN GÉLINAS" at 17565,1000 h60
  text "CRYPTUS / MOTHERBOARD" at 19345,980 h150
  text "DATE:" at 17550,800 h45
  text "PART NO.:" at 19050,800 h45
  text "REV:" at 21150,800 h45
  text "1_A" at 21420,700 h60
  text ".PRINT_DATE" at 17600,680 h70
  text "FILE NAME:" at 17550,500 h45
  text "DWG NO:" at 19050,500 h45
  text "SCALE:" at 21150,500 h45
  text ".PCB_FILE_NAME_NO_PATH" at 17600,380 h70
  text "1" at 1376.34,125 h100
  text "2" at 4157,125 h100
  text "3" at 6936.34,125 h100
  text "4" at 9733.01,125 h100
  text "5" at 12516.35,125 h100
  text "6" at 15307,125 h100
  text "7" at 18107,125 h100
  text "8" at 20887,125 h100
Drill Drawing:
  circle w10: c34799.12,28146.33 r33.33
  lines w10: 34765.79,27429.67 34832.46,27429.67 34799.12,27363 34765.79,27429.67 ; 34765.79,27529.67 34782.46,27529.67 34782.46,27513 34815.79,27513 34815.79,27529.67 34832.46,27529.67 34832.46,27563 34815.79,27563 34815.79,27579.67 34782.46,27579.67 34782.46,27563 34765.79,27563 34765.79,27529.67 ; 34765.79,27696.33 34799.12,27663 34832.46,27696.33 34799.12,27729.67 34765.79,27696.33 ; 34765.79,27813 34765.79,27829.67 34782.46,27846.33 34765.79,27863 34765.79,27879.67 34782.46,27879.67 34799.12,27863 34815.79,27879.67 34832.46,27879.67 34832.46,27863 34815.79,27846.33 34832.46,27829.67 34832.46,27813 34815.79,27813 34799.12,27829.67 34782.46,27813 34765.79,27813 ; 34765.79,27963 34832.46,27963 34832.46,28029.67 34765.79,28029.67 34765.79,27963
  lines w15: 34706,27318 42641.85,27318 ; 34706,28218 42641.85,28218 ; 35256.88,27168 35256.88,28368 ; 35846.72,27168 35846.72,28368 ; 36896.42,27168 36896.42,28368 ; 37402.29,27168 37402.29,28368 ; 38136.09,27168 38136.09,28368 ; 39325.75,27168 39325.75,28368 ; 39915.6,27168 39915.6,28368 ; 40661.4,27168 40661.4,28368 ; 41515.16,27168 41515.16,28368 ; 34706,27168 42641.85,27168 42641.85,28368 34706,28368 34706,27168
  text "Symbol" at 34796,28263 h72
  text "Count" at 35301.88,28263 h72
  text "Hole Size" at 35891.72,28263 h72
  text "Plated" at 36941.42,28263 h72
  text "Hole Type" at 37447.29,28263 h72
  text "Drill Layer Pair" at 38181.09,28263 h72
  text "Via/Pad" at 39370.75,28263 h72
  text "Pad Shape" at 39960.6,28263 h72
  text "Description" at 40706.4,28263 h72
  text "Hole Tolerance" at 41560.16,28263 h72
  text "4" at 35301.88,28113 h60
  text "60,0mil (1,52mm)" at 35891.72,28113 h60
  text "PTH" at 36941.42,28113 h60
  text "Round" at 37447.29,28113 h60
  text "POWER - LOW-SPEED" at 38181.09,28113 h60
  text "Pad" at 39370.75,28113 h60
  text "Rounded" at 39960.6,28113 h60
  text "+/-8,0mil" at 41560.16,28113 h60
  text "4" at 35301.88,27963 h60
  text "95,0mil (2,41mm)" at 35891.72,27963 h60
  text "PTH" at 36941.42,27963 h60
  text "Round" at 37447.29,27963 h60
  text "POWER - LOW-SPEED" at 38181.09,27963 h60
  text "Pad" at 39370.75,27963 h60
  text "Rounded" at 39960.6,27963 h60
  text "+/-20,0mil" at 41560.16,27963 h60
  text "4" at 35301.88,27813 h60
  text "135,0mil (3,43mm)" at 35891.72,27813 h60
  text "PTH" at 36941.42,27813 h60
  text "Round" at 37447.29,27813 h60
  text "POWER - LOW-SPEED" at 38181.09,27813 h60
  text "Pad" at 39370.75,27813 h60
  text "Rounded" at 39960.6,27813 h60
  text "+/-20,0mil" at 41560.16,27813 h60
  text "62" at 35301.88,27663 h60
  text "40,0mil (1,02mm)" at 35891.72,27663 h60
  text "PTH" at 36941.42,27663 h60
  text "Round" at 37447.29,27663 h60
  text "POWER - LOW-SPEED" at 38181.09,27663 h60
  text "Pad" at 39370.75,27663 h60
  text "(Mixed)" at 39960.6,27663 h60
  text "+/-5,0mil" at 41560.16,27663 h60
  text "96" at 35301.88,27513 h60
  text "10,0mil (0,25mm)" at 35891.72,27513 h60
  text "PTH" at 36941.42,27513 h60
  text "Round" at 37447.29,27513 h60
  text "POWER - LOW-SPEED" at 38181.09,27513 h60
  text "Via" at 39370.75,27513 h60
  text "Rounded" at 39960.6,27513 h60
  text "+/-4,0mil" at 41560.16,27513 h60
  text "148" at 35301.88,27363 h60
  text "12,0mil (0,31mm)" at 35891.72,27363 h60
  text "PTH" at 36941.42,27363 h60
  text "Round" at 37447.29,27363 h60
  text "POWER - LOW-SPEED" at 38181.09,27363 h60
  text "Via" at 39370.75,27363 h60
  text "Rounded" at 39960.6,27363 h60
  text "+/-4,0mil" at 41560.16,27363 h60
  text "318 Total" at 35301.88,27213 h60

## Dimensions
10052,8650 to 10052,8550 on M12_Dimensions
10000,9687 to 10236,9379.71 on M12_Dimensions
10000,9687 to 10050,9687 on M12_Dimensions
10250,6250 to 9629,5796 on M12_Dimensions
13437,6150 to 13687,6250 on M12_Dimensions
13437,6150 to 13687,6250 on M12_Dimensions
11564,6716 to 13269,6716 on M12_Dimensions
11564,6716 to 10250,6250 on M12_Dimensions
13269,9646 to 13687,9937 on M12_Dimensions
13269,9646 to 13269,6716 on M12_Dimensions
10250,9687 to 10000,9687 on M12_Dimensions
10250,9687 to 13687,9687 on M12_Dimensions
10250,9937 to 10250,6000 on M12_Dimensions
10000,9687 to 13937,9687 on M12_Dimensions

## Text inside footprints (layer, text, board x,y; h text height)
C1: Top Overlay "1 Farad" at 5088,9001.56 h30 r90; Top Overlay "SCMR22L105SRBB0" at 5433,8988.57 h30 r90
C2: Top Overlay "SCMR22L105SRBB0" at 5983,8988.57 h30 r90; Top Overlay "1 Farad" at 5638,9001.56 h30 r90
C3: Top Overlay "1 Farad" at 6188,9001.56 h30 r90; Top Overlay "SCMR22L105SRBB0" at 6533,8988.57 h30 r90